# Altium PCB DAL_IRL.PcbDoc
Units mm, origin at the board's own origin, x right, y up, seen from the top; angles counter-clockwise.
Board outline 25 x 35 mm, 2 copper layers (Top Layer, Bottom Layer); 16 components, 11 nets, 46 pads, 37 vias.
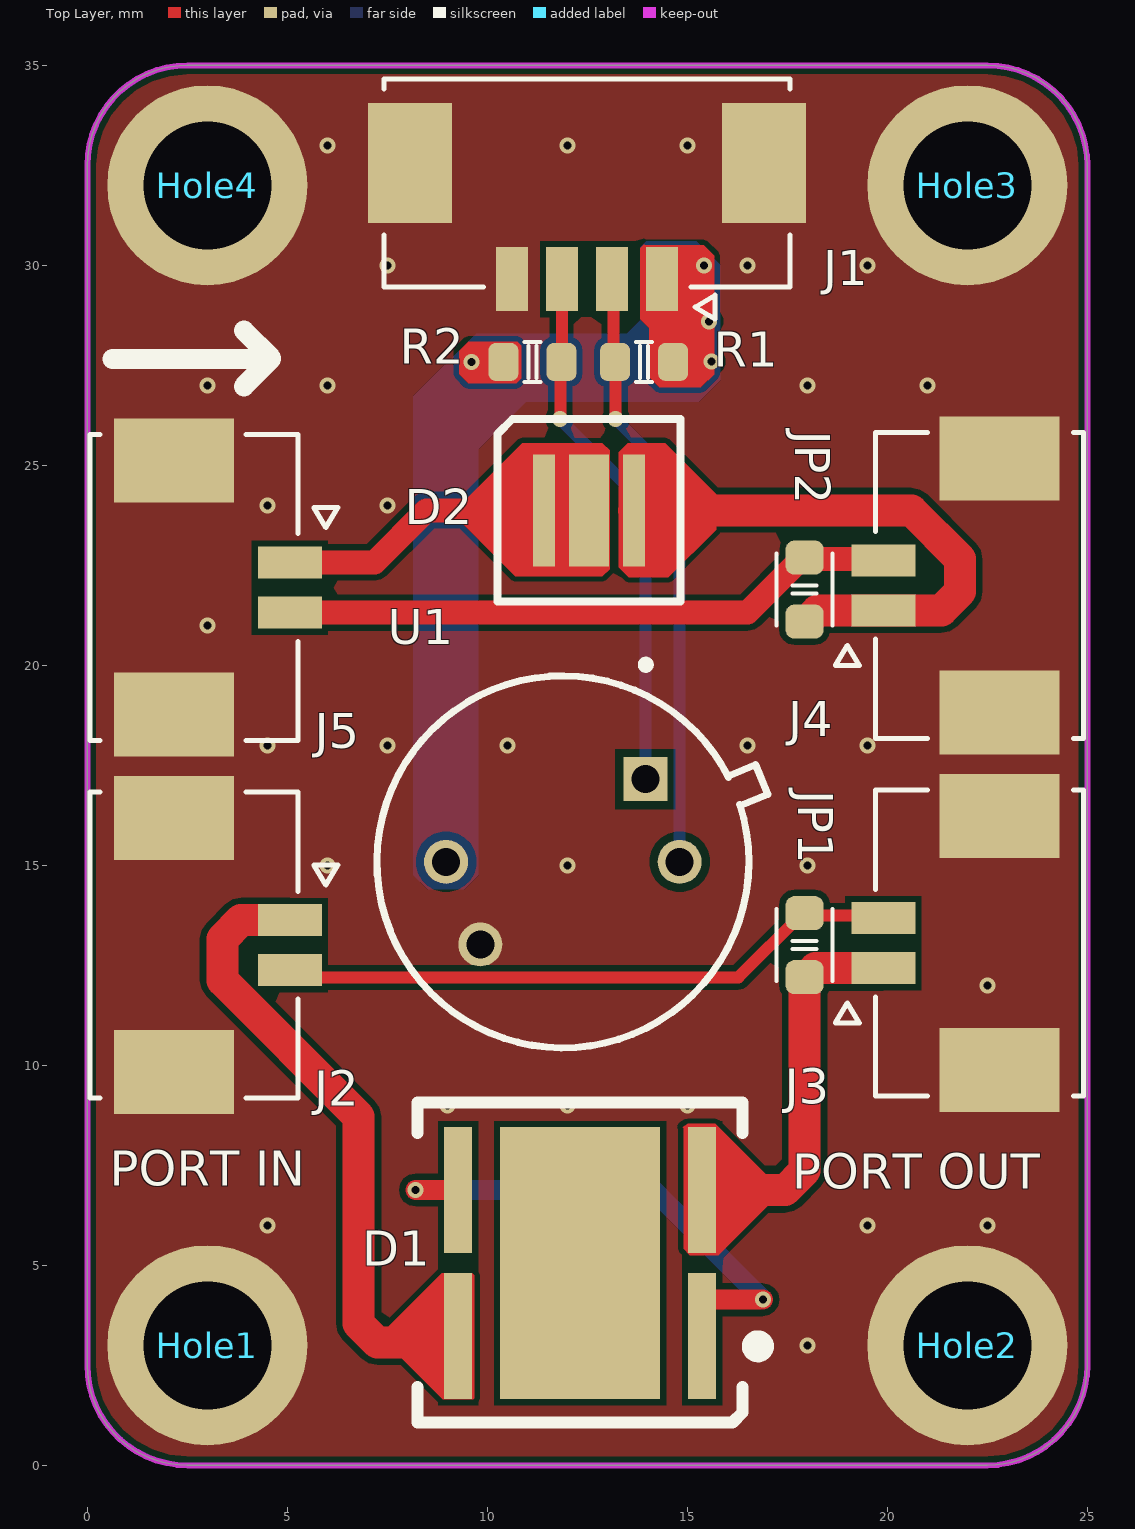
[diagram p0: Top Layer view]
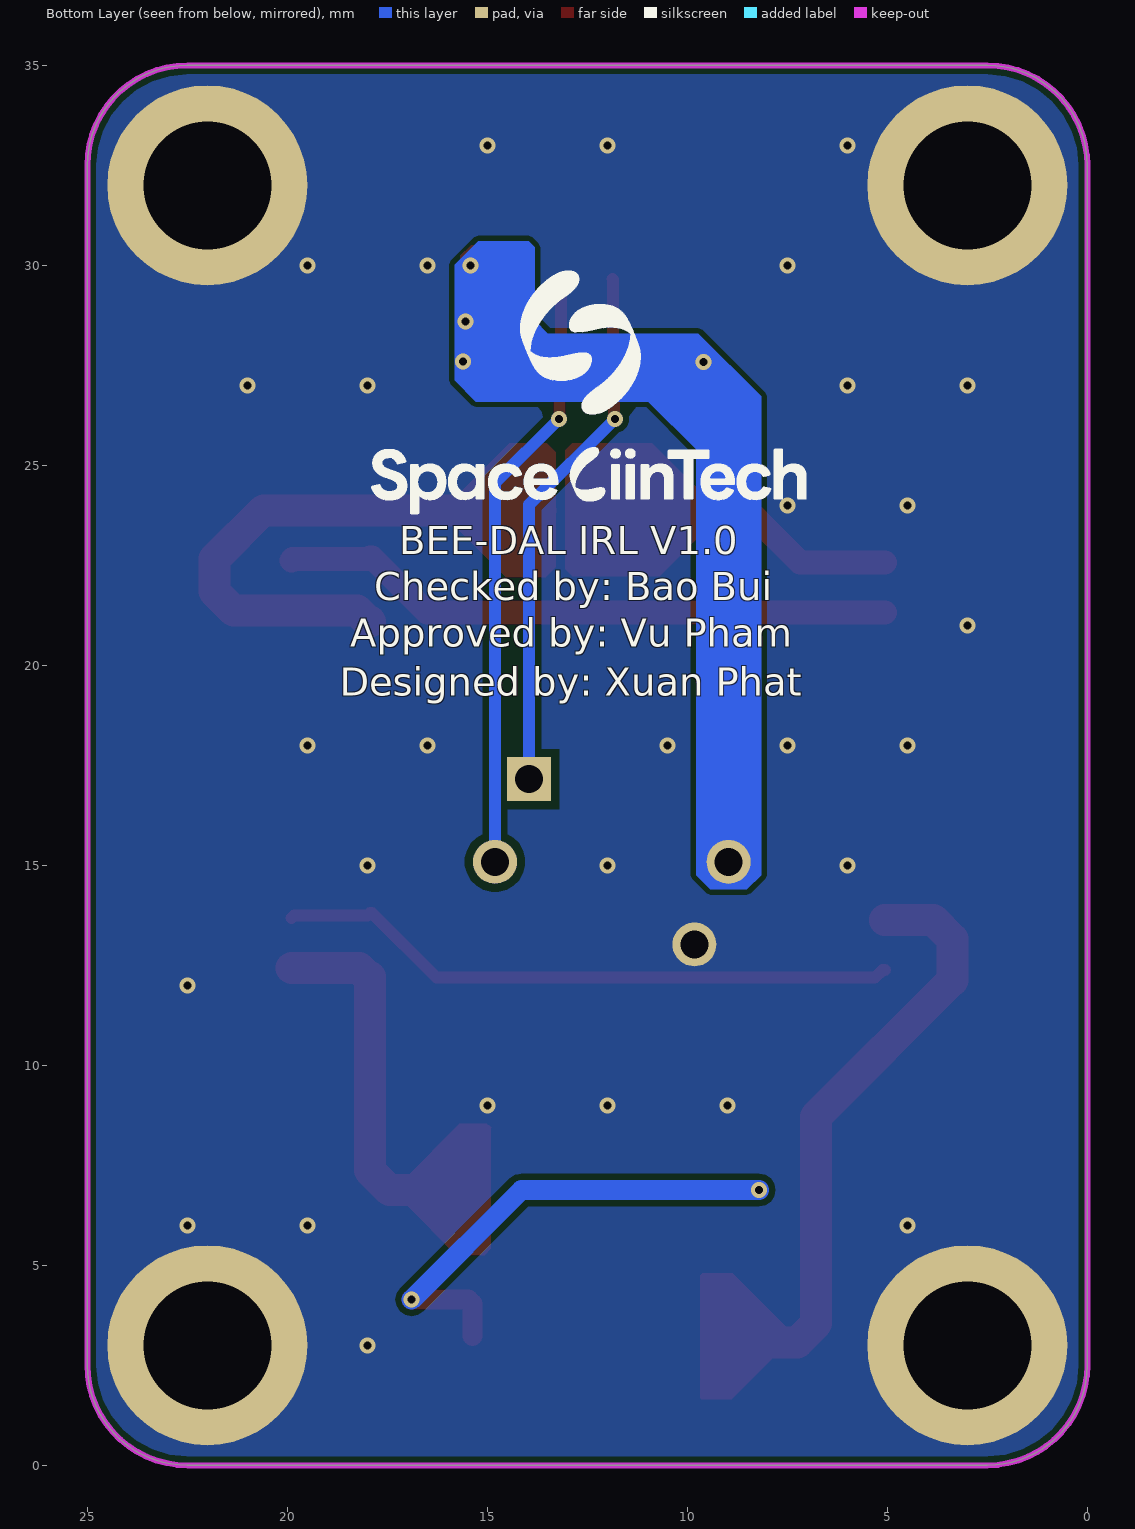
[diagram p1: Bottom Layer view, seen from below]
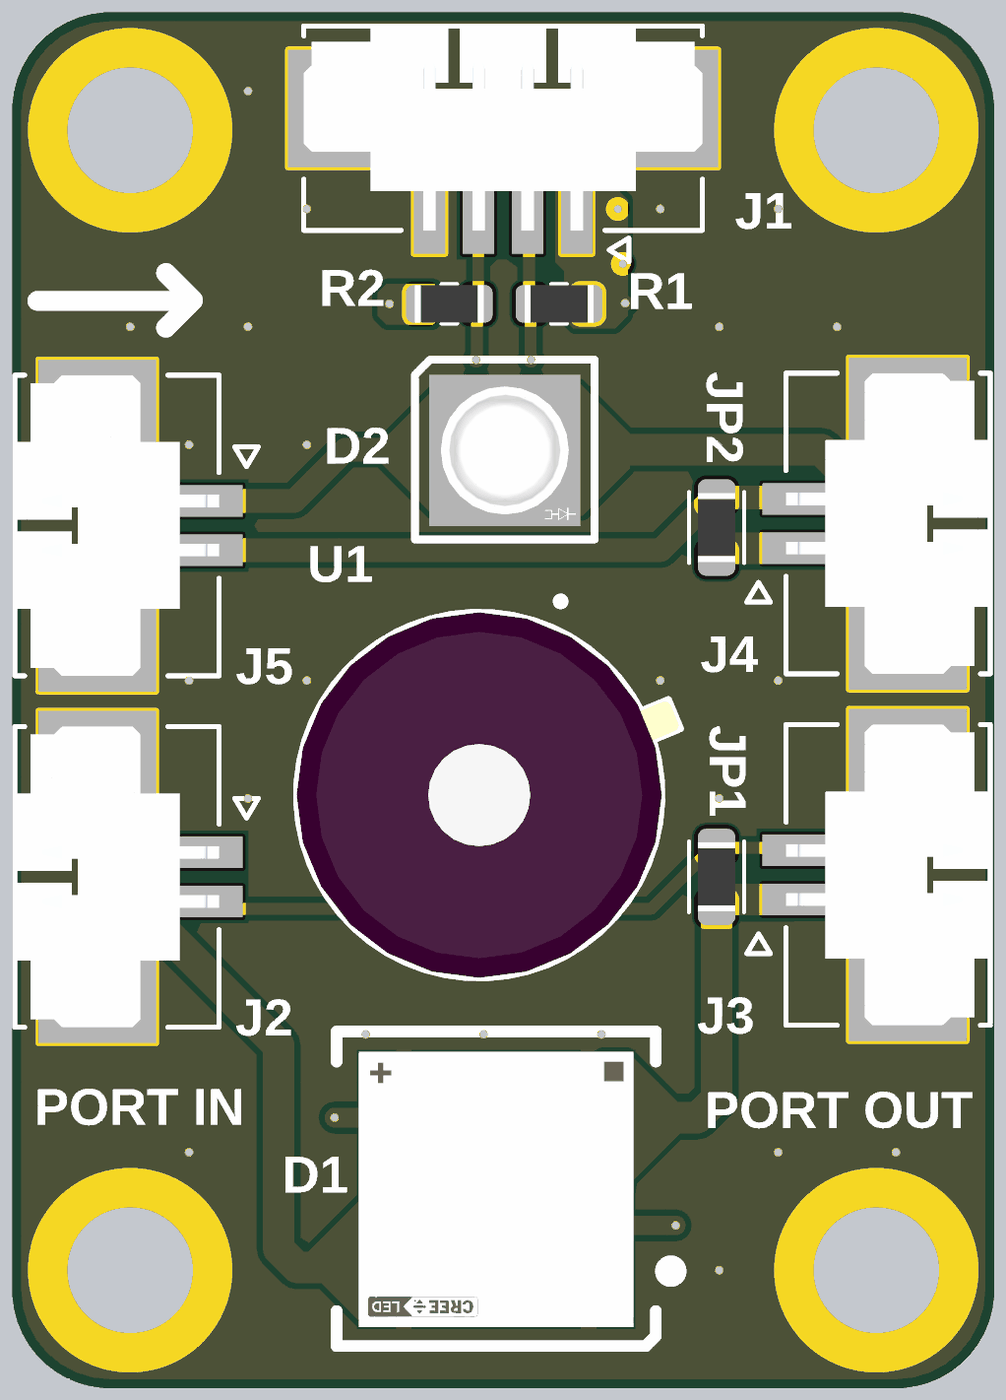
[diagram p2: 3D render of the assembled board from above, using the file's embedded part models]

## Layer stack, top to bottom
Top Solder: solder mask 0.0102, Solder Resist, Dk 3.5
Top Layer: signal copper 0.0356
Dielectric 1: dielectric 0.32, FR-4, Dk 4.8
Bottom Layer: signal copper 0.0356
Bottom Solder: solder mask 0.0102, Solder Resist, Dk 3.5

## Board outline
0,2.5 0,32.5 cw(c2.5,32.5) 2.5,35 22.5,35 cw(c22.5,32.5) 25,32.5 25,2.5 cw(c22.5,2.5) 22.5,0 2.5,0 cw(c2.5,2.5)

## Design rules (kind name [scope] priority, off if disabled: settings)
Clearance [All] p1: gap=0.125 ignorepadtopadclearanceinfootprint=TRUE except(0.15: Arc-Fill Arc-Poly Track-Poly Track-Text SMDPad-Poly THPad-Fill Via-Fill Via-Poly Fill-Fill Fill-Poly Poly-Poly; 0.2: THPad-Poly; 0.52: Track-Fill)
HoleSize [All] p1: absolutevalues=TRUE maxlimit=5 minlimit=0.2 maxpercent=80.000 minpercent=20.000
PolygonConnect [All] p1: connectstyle=Direct reliefconductorwidth=0.254 reliefentries=4 polygonreliefangle="90 Angle" airgapwidth=0.254
RoutingVias [All] p1: holewidth=0.2 width=0.4 viastyle="Through Hole" minholewidth=0.1 minwidth=0.2 maxholewidth=0.711 maxwidth=1.27
SilkToSolderMaskClearance [IsPad] p1: minsilkscreentomaskgap=0.1 clearancetoexposedcopper=TRUE
SolderMaskExpansion [All] p1: expansion=0.102 istentingtop=FALSE
SupplyNets "Schematic Supply Nets_1" [InNet('GND')] p1: voltage=0.000
SupplyNets "Schematic Supply Nets" [InNet('+3V3')] p2: voltage=0.000
UnRoutedNet [All] p1: checkbadconnections=TRUE
UnpouredPolygon UnpouredPolygon_1 [All] p1:
Width [All] p1: maxlimit=1 minlimit=0.254 preferedwidth=0.3 minimp=50.000000 maximp=50.000000 favimp=50.000000
26 further rules are at their usual default settings.

## Components (designator, comment, footprint, x,y, rotation, side; value= is the part's Value field where it differs from the comment)
D1 "XHP70D" "XHP70.3 High Intensity" 15.369,3.23 r180 top
D2 "SFH 4715AS" "SFH 4715AS" 12.54,23.876 r270 top
Hole1 "hole_space" HEX-M3_NoVia 3,3 r0 top
Hole2 "hole_space" HEX-M3_NoVia 22,3 r0 top
Hole3 "hole_space" HEX-M3_NoVia 22,32 r0 top
Hole4 "hole_space" HEX-M3_NoVia 3,32 r0 top
J1 "HEADER 4x1" MOLEX_0532610471 12.497,32.055 r180 top
J2 "Header 2x1_2M" MOLEX_0532610271 2.663,13.005 r270 top
J3 "Header 2x1_2M" MOLEX_0532610271 22.301,13.056 r90 top
J4 "Header 2x1_2M" MOLEX_0532610271 22.301,21.996 r90 top
J5 "Header 2x1_2M" MOLEX_0532610271 2.663,21.946 r270 top
JP1 "DNP/0R" RES_C_1608X60 17.932,13.005 r270 top
JP2 "DNP/0R" RES_C_1608X60 17.932,21.895 r270 top
R1 "DNP/4.7k" RES_C_1608X60_L 13.919,27.584 r180 top
R2 "DNP/4.7k" RES_C_1608X60_L 11.125,27.584 r0 top
U1 "MLX90642" "TO39 package" 13.953,17.152 r270 top

## Footprints (in the part's own frame and the unit in brackets; to place one, negate y for a bottom-side part, rotate by r counter-clockwise, add the part's x,y. Pads: shape width x height; smd on the part's side, far side on the other; paste and mask are expansions set on the pad)
HEX-M3_NoVia [mm]
  round 5 / inner round 4.4 / far side round 5 hole 3.2: 1(0,0)
MOLEX_0532610271 [mm]
  rect 0.8x1.6 smd mask+0.076: 1(-0.625,2.4) 2(0.625,2.4)
  rect 2.1x3 smd mask+0.076: M1(-3.175,-0.5) M2(3.175,-0.5)
  silkscreen extent -3.83,-2.6 3.83,3.6, body extent -3.83,-2.6 3.83,2.6, height 3.4
MOLEX_0532610471 [mm]
  rect 0.8x1.6 smd mask+0.076: 1(-1.875,2.4) 2(-0.625,2.4) 3(0.625,2.4) 4(1.875,2.4)
  rect 2.1x3 smd mask+0.076: M1(-4.425,-0.5) M2(4.425,-0.5)
  silkscreen extent -5.07,-2.6 5.07,3.4, body extent -5.07,-2.6 5.07,2.6, height 3.4
RES_C_1608X60 [mm] "Chip Resistor, 2-Leads, Body 1.63x0.83mm, IPC High Density"
  rrect50% 0.85x0.95 smd: 1(-0.8,0) 2(0.8,0)
  silkscreen extent -0.9,-0.7 0.9,0.7, body extent -0.87,-0.48 0.87,0.48, height 0.6
RES_C_1608X60_L [mm] "Chip Resistor, 2-Leads, Body 1.63x0.83mm, IPC High Density"
  rrect50% 0.75x0.95 smd: 1(-0.725,0) 2(0.725,0)
  silkscreen extent -0.2,-0.5 0.2,0.5, body extent -0.87,-0.48 0.87,0.48, height 0.6
"SFH 4715AS" [mm]
  rect 2.8x0.55 smd paste-2 mask+0: A1(0,-1.125) C(0,1.125)
  rect 2.8x1 smd paste-2 mask+0: A2(0,0)
  silkscreen extent -2.29,-2.29 2.29,2.29, body extent -1.91,-1.92 1.94,1.92, height 2.41
"TO39 package" [mm]
  rect 1.1x1.1 / inner round 1.1 / far side rect 1.1x1.1 hole 0.7: 1(0,0)
  round 1.1 hole 0.7: 2(2.065,-4.985) 3(4.13,-4.13) 4(2.065,0.855)
  silkscreen extent -2.96,-6.71 6.71,3.06, body extent -2.57,-6.7 6.7,3.01, height 6.1
"XHP70.3 High Intensity" [mm]
  rect 0.7x3.15 smd paste-1000 mask+0: 1(0,0) 2(6.1,0) 3(0,-3.65) 4(6.1,-3.65)
  rect 4x6.8 smd paste-1000 mask+0: 5(3.05,-1.825)
  silkscreen extent -1.6,-5.84 7.11,2.16, body extent -0.62,-5.49 6.71,1.84, height 0.25

## Part data
D1: "LED Lighting XLamp® XHP70.3 White, Cool 5000K 11.2V 1.05A 120° 2828"
D2: "Infrared (IR) Emitter 860nm 3.2V 1.5A"
J1: library part "Header 4x1_2M"
JP1 JP2: library part JUMPER_1_1
R1 R2: library part _RES_B_2, "RES"
U1: "32X24 THERMAL ARRAY, 110DEG FOV"

## Via types
v1: diameter 0.4, hole 0.2, Top Layer to Bottom Layer, tented both sides, 35 vias
v2: diameter 0.4, hole 0.2, Top Layer to Bottom Layer, 2 vias

## Nets (pads, with @x,y where several pads share a name; then routed paths per layer and width w, separated by ;. In a path a pad name is that pad's centre, name@x,y a point inside that pad or via, vN(x,y) a via of type N, cw(c..) or ccw(c..) an arc to the next point about the centre after c; other vN are vias at no path point)
+3V3: J1.1 R1.1 R2.1 U1.2 | length 4.8
  Top Layer w0.254: v1(9.601,27.584) R2.1 ; R1.1 14.652,27.592 15.596,27.592 v1(15.604,27.6) ; v2(15.418,29.997) 14.645,29.997 14.372,29.724 14.372,29.255 14.998,28.628 15.517,28.628 v2(15.545,28.6)
GND: Hole1.1 Hole2.1 Hole3.1 Hole4.1 J1.4 J1.M1 J1.M2 J2.M1 J2.M2 J3.M1 J3.M2 J4.M1 J4.M2 J5.M1 J5.M2 U1.3 | length 0.7
  Top Layer w1: Hole2.1 Hole2.1@22.5,3.5
  other v1: 18,3 4.5,6 19.5,6 22.5,6 9,9 12,9 15,9 22.5,12 6,15 12,15 18,15 4.5,18 7.5,18 10.5,18 16.5,18 19.5,18 3,21 4.5,24 7.5,24 3,27 6,27 18,27 21,27 7.5,30 16.5,30 19.5,30 6,33 12,33 15,33
IR_1_N_OUT: J2.2 J3.2 JP1.1 | length 15.6
  Top Layer w0.3: J2.2 5.121,12.38 5.303,12.198 16.275,12.198 17.882,13.805 JP1.1 17.995,13.743 19.839,13.743 J3.2
IR_1_P_IN: D1.2 J2.1 | length 15.2
  Top Layer w0.8: J2.1 3.845,13.63 3.377,13.161 3.377,12.124 6.782,8.719 6.782,3.542 7.25,3.073 8.915,3.073
IR_1_P_OUT: D1.3 J3.1 JP1.2 | length 9.3
  Top Layer w0.8: 15.773,6.883 15.777,6.88 17.446,6.88 17.932,7.366 JP1.2 17.982,12.205 18.208,12.431 J3.1
IR_2_N_OUT: J4.2 J5.2 JP2.1 | length 15.4
  Top Layer w0.6: J5.2 16.508,21.321 17.882,22.695 JP2.1 17.969,22.658 19.864,22.658 J4.2
IR_2_P_IN: D2.A1 D2.A2 J5.1 | length 8
  Top Layer w0.6: J5.1 7.178,22.571 8.484,23.876 D2.A1 D2.A2
IR_2_P_OUT: D2.C J4.1 JP2.2 | length 13.7
  Top Layer w0.8: D2.C 20.599,23.876 21.819,22.657 21.819,21.84 21.35,21.371 J4.1 18.259,21.371 17.982,21.095 JP2.2
NetD1_1: D1.1 D1.4 | length 13.3
  Top Layer w0.5: v1(8.204,6.883) 8.208,6.88 D1.4 ; D1.1 15.369,4.04 15.469,4.14 v1(16.891,4.14)
  Bottom Layer w0.5: v1(8.204,6.883) 14.148,6.883 v1(16.891,4.14)
SCL: J1.2 R1.2 U1.4 | length 15.2
  Top Layer w0.3: J1.2 13.158,29.619 13.158,27.621 R1.2 13.201,27.578 13.201,26.169 v1(13.208,26.162)
  Bottom Layer w0.3: v1@13.227,26.143 14.808,24.562 U1.4
SDA: J1.3 R2.2 U1.1 | length 13.4
  Top Layer w0.3: v1(11.811,26.162) 11.83,26.181 11.83,27.564 11.861,27.595 11.861,29.644 J1.3
  Bottom Layer w0.3: v1@11.83,26.143 13.953,24.02 U1.1
pads on no net: D1.5

## Polygon pours and split planes (outlines as drawn)
GND on Bottom Layer "GND_L02_P001" (solid, pour order 1): 0,2.5 0,32.5 cw(c2.5,32.5) 2.5,35 22.5,35 cw(c22.5,32.5) 25,32.5 25,2.5 cw(c22.5,2.5) 22.5,0 2.5,0 cw(c2.5,2.5)
GND on Top Layer "GND_L01_P000" (solid, pour order 0): 0,2.5 0,32.5 cw(c2.5,32.5) 2.5,35 22.5,35 cw(c22.5,32.5) 25,32.5 25,2.5 cw(c22.5,2.5) 22.5,0 2.5,0 cw(c2.5,2.5)

## Keep-outs
Keep-Out Layer:
  the board outline again, w0.15

## Other copper
Top Layer:
  region net IR_1_P_IN: 9.627,4.801 8.865,4.801 7.428,3.364 7.428,3.113 8.89,1.651 9.652,1.651 9.677,1.676 9.677,4.75
  region net IR_1_P_OUT: 15.011,8.534 15.697,8.534 17.043,7.188 17.043,6.528 15.773,5.258 15.062,5.258 14.91,5.41 14.91,8.433 14.884,8.458
  region net IR_2_P_OUT: 14.453,25.552 15.723,24.282 15.723,23.393 14.529,22.2 13.538,22.2 13.284,22.454 13.284,25.324 13.513,25.552
  region net IR_2_P_IN: 12.878,25.552 13.056,25.375 13.056,22.403 12.878,22.225 10.693,22.225 9.322,23.597 9.322,24.003 10.871,25.552
  region net +3V3: 13.919,30.505 15.406,30.505 15.672,30.24 15.672,27.28 15.342,26.949 14.3,26.949 14.046,27.203 14.046,28.423 13.818,28.651 13.818,30.429 13.919,30.531
  region net +3V3: 10.744,28.092 10.846,27.991 10.846,27.178 10.719,27.051 9.525,27.051 9.296,27.28 9.296,27.864 9.525,28.092
Bottom Layer:
  region net +3V3: 13.97,30.607 15.227,30.607 15.819,30.015 15.819,27.122 15.291,26.594 10.973,26.594 9.779,25.4 9.779,14.757 9.423,14.402 8.509,14.402 8.153,14.757 8.153,26.721 9.728,28.296 13.487,28.296 13.818,28.626 13.818,30.455

## Silkscreen, mask and mechanical layers (free items; w line width, h text height)
Top Overlay:
  lines w0.2: 4.597,27.661 4.597,27.686
  lines w0.5: 0.635,27.661 4.597,27.661 3.912,26.975 ; 3.912,28.372 4.597,27.686
  text "PORT IN" at 0.559,6.698 h1.5
  text "PORT OUT" at 17.628,6.622 h1.5
Bottom Overlay:
  drawing of 17 lines, arcs and shapes, not listed
  text "BEE-DAL IRL V1.0" at 17.204,22.545 h1.2
  text "Checked by: Bao Bui" at 17.826,21.389 h1.2
  text "Approved by: Vu Pham" at 18.427,20.233 h1.2
  text "Designed by: Xuan Phat" at 18.687,19.005 h1.2